# Altium PCB Digital_Clock_PCB_2.0.PcbDoc
Units mm, origin at the board's own origin, x right, y up, seen from the top; angles counter-clockwise.
Board outline 80.51 x 40.51 mm, 2 copper layers (Top Layer, Bottom Layer); 42 components, 38 nets, 161 pads, 25 vias.
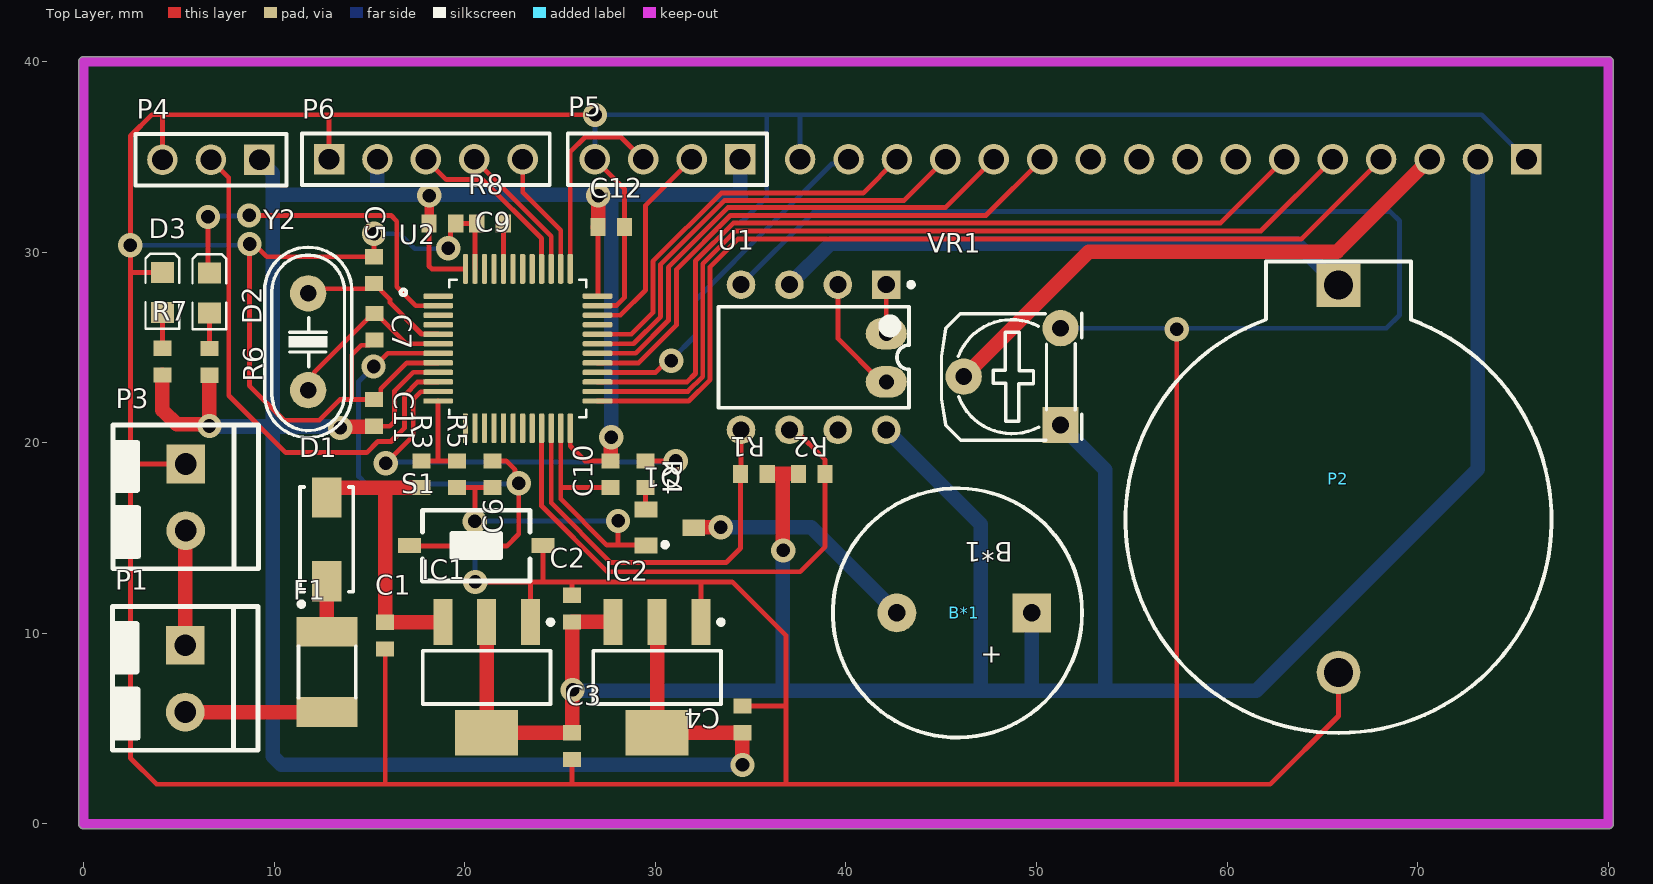
[diagram p0: Top Layer view]
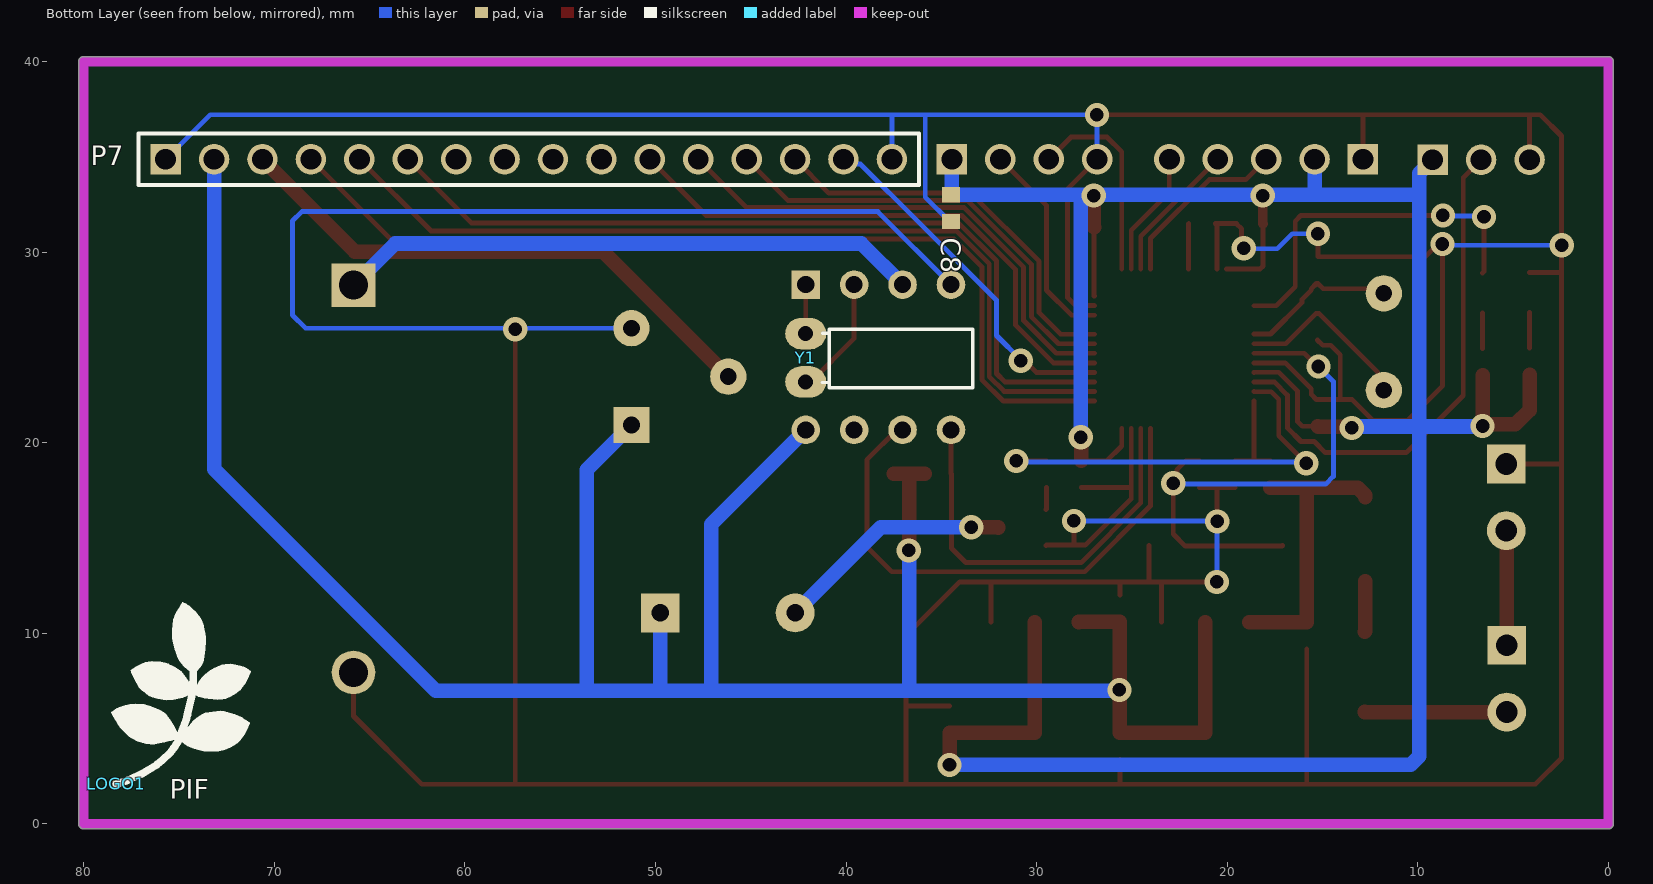
[diagram p1: Bottom Layer view, seen from below]
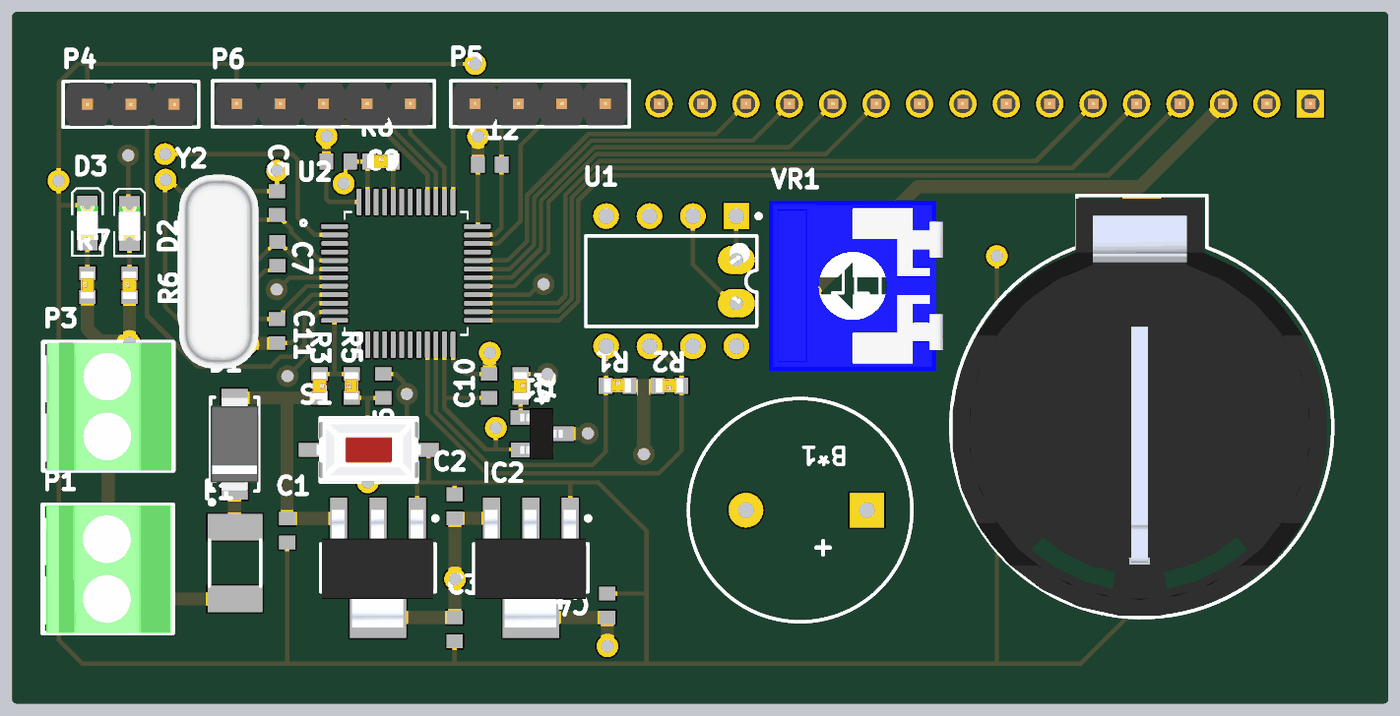
[diagram p2: 3D render of the assembled board from above, using the file's embedded part models]

## Layer stack, top to bottom
Top Solder: solder mask 0.0102, Solder Resist, Dk 3.5
Top Layer: signal copper 0.0356
Dielectric 1: dielectric 0.32, FR-4, Dk 4.8
Bottom Layer: signal copper 0.0356
Bottom Solder: solder mask 0.0102, Solder Resist, Dk 3.5

## Board outline
0,-0.254 cw(c0,0) -0.254,0 -0.254,40 cw(c0,40) 0,40.254 80,40.254 cw(c80,40) 80.254,40 80.254,0 cw(c80,0) 80,-0.254

## Design rules (kind name [scope] priority, off if disabled: settings)
Clearance [All] p1: gap=0.203 ignorepadtopadclearanceinfootprint=FALSE
PolygonConnect [All] p1: connectstyle=Relief reliefconductorwidth=0.254 reliefentries=4 polygonreliefangle="90 Angle" airgapwidth=0.254
RoutingVias [All] p1: holewidth=0.711 width=1.27 viastyle="Through Hole" minholewidth=0.6 minwidth=0.3 maxholewidth=0.711 maxwidth=1.27
SolderMaskExpansion [All] p1: expansion=0.102 istentingtop=FALSE
Width [All] p1: maxlimit=0.762 minlimit=0.254 preferedwidth=0.508
30 further rules are at their usual default settings.

## Components (designator, comment, footprint, x,y, rotation, side; value= is the part's Value field where it differs from the comment)
B*1 "Buzzer" BUZZER 47.752,11.074 r180 top
C1 "Cap Non-Pol SMD" CAP-SM-0603 15.824,9.881 r90 top value=10uF
C2 "Cap Non-Pol SMD" CAP-SM-0603 25.629,11.303 r270 top value=10uF
C3 "Cap Non-Pol SMD" CAP-SM-0603 25.629,4.089 r90 top value=10uF
C4 "Cap Non-Pol SMD" CAP-SM-0603 34.569,5.486 r270 top value=10uF
C5 "Cap Non-Pol SMD" CAP-SM-0603 15.24,29.058 r270 top value=20pF
C6 "Cap Non-Pol SMD" CAP-SM-0603 21.463,18.35 r90 top value=0.1uF
C7 "Cap Non-Pol SMD" CAP-SM-0603 15.265,26.086 r270 top value=20pF
C8 "Cap Non-Pol SMD" CAP-SM-0603 34.493,32.309 r90 bottom value=0.1uF
C9 "Cap Non-Pol SMD" CAP-SM-0603 18.821,31.496 r180 top value=100nF
C10 "Cap Non-Pol SMD" CAP-SM-0603 27.648,18.35 r90 top value=100nF
C11 "Cap Non-Pol SMD" CAP-SM-0603 15.24,21.565 r270 top value=100nF
C12 "Cap Non-Pol SMD" CAP-SM-0603 27.686,31.318 r180 top value=100nF
D1 "D Schottky" SS34 12.751,14.935 r90 top
D2 "LED SMD" LED_0805_Blue 6.604,27.864 r90 top
D3 "LED SMD" LED_0805_Blue 4.14,27.889 r90 top
F1 "Fuse" "FUSE SMD" 12.776,7.976 r270 top
IC1 "LM1117" SOT223-4N 21.147,7.692 r270 top value=LM317
IC2 "LM1117" SOT223-4N 30.088,7.692 r270 top value=LM317
LOGO1 "LOGO PIF" "PIF LOGO BIG SSTOP" 78.559,1.746 r180 bottom
P1 "Domino 2" "DOMINO SMALL 2" 6.604,9.373 r270 top
P2 "VBAT" "VBAT CR2030" 65.837,18.11 r90 top
P3 "Domino 2" "DOMINO SMALL 2" 6.629,18.892 r270 top
P4 "61300311121" 61300311121 6.68,34.849 r180 top
P5 "61300411121" 61300411121 30.632,34.874 r180 top
P6 "61300511121" 61300511121 17.958,34.874 r0 top
P7 "61301611121" 61301611121 56.642,34.874 r180 bottom
Q1 "C1815" SOT23B 30.759,15.545 r270 top
R1 "RESISTOR SMD" RES-SM-0603 34.479,18.364 r0 top value=10K
R2 "RESISTOR SMD" RES-SM-0603 38.887,18.364 r180 top value=10K
R3 "RESISTOR SMD" RES-SM-0603 17.729,19.036 r270 top value=10K
R4 "RESISTOR SMD" RES-SM-0603 29.489,19.036 r270 top value=22K
R5 "RESISTOR SMD" RES-SM-0603 19.596,17.664 r90 top value=10K
R6 "RESISTOR SMD" RES-SM-0603 6.604,23.557 r90 top value=1K
R7 "RESISTOR SMD" RES-SM-0603 4.14,23.571 r90 top value=1K
R8 "RESISTOR SMD" RES-SM-0603 20.636,31.496 r0 top value=100K
S1 "Tact SW - 2Pin" SW-SMD 20.599,14.605 r0 top
U1 "DS1307+" MAXM-P8-1 38.303,24.486 r270 top
U2 "STM32F103C8T6" QFP50P900X900X160-48N 22.784,24.943 r0 top
VR1 "10K" "Varistor 1" 51.257,20.93 r90 top value="VR 10K"
Y1 "32.768kHz" "XTAL 32768 3x8" 42.113,23.19 r180 bottom
Y2 "XTAL" XT2 11.786,25.298 r90 top

## Footprints (in the part's own frame and the unit in brackets; to place one, negate y for a bottom-side part, rotate by r counter-clockwise, add the part's x,y. Pads: shape width x height; smd on the part's side, far side on the other; paste and mask are expansions set on the pad)
61300311121 [mm] "Pin Header, pitch 2.54 mm, THT, Vertical, single row, 3p"
  rect 1.6x1.6 hole 1.1: 1(-2.54,0)
  round 1.6 hole 1.1: 2(0,0) 3(2.54,0)
  silkscreen extent -3.96,-1.35 3.96,1.35, body extent -3.81,-1.27 3.81,1.27, height 8.57
61300411121 [mm] "Pin Header, pitch 2.54 mm, THT, Vertical, single row, 4p"
  rect 1.6x1.6 hole 1.1: 1(-3.81,0)
  round 1.6 hole 1.1: 2(-1.27,0) 3(1.27,0) 4(3.81,0)
  silkscreen extent -5.23,-1.35 5.23,1.35, body extent -5.08,-1.27 5.08,1.27, height 8.57
61300511121 [mm] "Pin Header, pitch 2.54 mm, THT, Vertical, single row, 5p"
  rect 1.6x1.6 hole 1.1: 1(-5.08,0)
  round 1.6 hole 1.1: 2(-2.54,0) 3(0,0) 4(2.54,0) 5(5.08,0)
  silkscreen extent -6.5,-1.35 6.5,1.35, body extent -6.35,-1.27 6.35,1.27, height 8.57
61301611121 [mm] "Pin Header, pitch 2.54 mm, THT, Vertical, single row, 16p"
  rect 1.6x1.6 hole 1.1: 1(-19.05,0)
  round 1.6 hole 1.1: 2(-16.51,0) 3(-13.97,0) 4(-11.43,0) 5(-8.89,0) 6(-6.35,0) 7(-3.81,0) 8(-1.27,0) 9(1.27,0) 10(3.81,0) 11(6.35,0) 12(8.89,0) 13(11.43,0) 14(13.97,0) 15(16.51,0) 16(19.05,0)
  silkscreen extent -20.47,-1.35 20.47,1.35, body extent -20.32,-1.27 20.32,1.27, height 8.57
BUZZER [mil]
  rect 80x80 hole 36: 1(-78.73,0)
  round 80 hole 36: 2(200,0)
  silkscreen extent -182,-257 332,257
CAP-SM-0603 [mm] "SMD Ceramic Capacitor Size 0603"
  rect 0.8x0.95 smd: 1(-0.7,0) 2(0.7,0)
  body extent -0.85,-0.45 0.85,0.45, height 0.6
"DOMINO SMALL 2" [mil] "3.5 mm"
  rect 80x80 hole 45: 1(0,-50)
  round 80 hole 45: 2(137.8,-50)
  silkscreen extent -80,-203 217,100, body extent -79,-192 217,95, height 335
"FUSE SMD" [mm] "SMD FUSE"
  rect 1.55x3.21 smd: 1(-2.1,0) 2(2.1,0)
  silkscreen extent -1.35,-1.5 1.35,1.51, body extent -2.37,-1.71 2.36,1.71, height 0.75
LED_0805_Blue [mm] "Chip LED, 2-Leads, Body 2.0x1.3mm, IPC Medium Density"
  rect 1.1x1.2 smd: 1(-1.05,0) 2(1.05,0)
  silkscreen extent -1.91,-0.89 2.03,0.89, body extent -1,-0.63 1,0.62, height 0.68
MAXM-P8-1 [mm] "DIP, 8-Leads, Body 9.375x6.985mm, Pitch 2.54mm"
  rect 1.5x1.5 hole 0.9: 1(-3.81,3.81)
  round 1.5 hole 0.9: 2(-3.81,1.27) 3(-3.81,-1.27) 4(-3.81,-3.81) 5(3.81,-3.81) 6(3.81,-1.27) 7(3.81,1.27) 8(3.81,3.81)
  silkscreen extent -3.93,-5 2.65,5.24, body extent -3.95,-4.95 3.95,4.95, height 4.58
"PIF LOGO BIG SSTOP" [mil]
  rect 15x15 smd: 1(11,14)
  silkscreen extent 0,14 289,389
QFP50P900X900X160-48N [mm]
  rrect50% 1.56x0.28 smd: 1(-4.18,2.75) 2(-4.18,2.25) 3(-4.18,1.75) 4(-4.18,1.25) 5(-4.18,0.75) 6(-4.18,0.25) 7(-4.18,-0.25) 8(-4.18,-0.75) 9(-4.18,-1.25) 10(-4.18,-1.75) 11(-4.18,-2.25) 12(-4.18,-2.75) 25(4.18,-2.75) 26(4.18,-2.25) 27(4.18,-1.75) 28(4.18,-1.25) 29(4.18,-0.75) 30(4.18,-0.25) 31(4.18,0.25) 32(4.18,0.75) 33(4.18,1.25) 34(4.18,1.75) 35(4.18,2.25) 36(4.18,2.75)
  rrect50% 0.28x1.56 smd: 13(-2.75,-4.18) 14(-2.25,-4.18) 15(-1.75,-4.18) 16(-1.25,-4.18) 17(-0.75,-4.18) 18(-0.25,-4.18) 19(0.25,-4.18) 20(0.75,-4.18) 21(1.25,-4.18) 22(1.75,-4.18) 23(2.25,-4.18) 24(2.75,-4.18) 37(2.75,4.18) 38(2.25,4.18) 39(1.75,4.18) 40(1.25,4.18) 41(0.75,4.18) 42(0.25,4.18) 43(-0.25,4.18) 44(-0.75,4.18) 45(-1.25,4.18) 46(-1.75,4.18) 47(-2.25,4.18) 48(-2.75,4.18)
  silkscreen extent -6.15,-3.6 3.6,3.6
RES-SM-0603 [mm]
  rect 0.8x0.95 smd: 1(-0.014,0) 2(1.386,0)
  body extent -0.11,-0.4 1.49,0.4, height 0.3
SOT23B [mm] "SOT 23B"
  rect 0.85x1.2 smd: 1(0.94,-1.245) 2(0,1.25) 3(-0.95,-1.25)
  silkscreen extent 0.77,-0.38 1.02,-0.13, body extent -1.5,-1.3 1.5,1.2, height 1.06
SOT223-4N [mm] "SOT223, 4-Leads, Body 6.5x3.5mm, Pitch 2.3mm, Lead Span 7mm, IPC Medium Density"
  rect 2.4x1 smd: 1(-2.9,2.3) 2(-2.9,0) 3(-2.9,-2.3)
  rect 2.4x3.3 smd: 4(2.9,0)
  silkscreen extent -3.02,-3.35 1.4,3.48, body extent -3.39,-3.27 3.5,3.23, height 1.72
SS34 [mm] "DO-214-AC/SMA Molded Diode, Body 5.3x2.6mm, IPC Medium Density"
  rect 2.1x1.55 smd: 1(-2.2,0) 2(2.2,0)
  silkscreen extent -3.52,-1.4 2.75,1.45, body extent -2.75,-1.4 2.75,1.4, height 2.3
SW-SMD [mm] "Switch SMD type"
  rect 1.2x0.8 smd: 1(-3.5,0) 2(3.5,0)
  silkscreen extent -2.82,-1.85 2.82,1.85, body extent -3.05,-1.85 3.05,1.85, height 2.5
"Varistor 1" [mil] "Resistor Variable"
  rect 75x75 hole 35: 1(0,0)
  round 75 hole 35: 2(100,200) 3(200,0)
  silkscreen extent -31,-44 231,246, body extent -68,-117 326,285, height 165
"VBAT CR2030" [mil]
  rect 90x90 hole 60: 1(400,0)
  round 90 hole 60: 2(-400,0)
  silkscreen extent -525,-440 449,440, body extent -523,-428 442,438, height 335
XT2 [mil] "Footpin for Crystal 2 pin"
  round 75 hole 34: 1(-100,0) 2(100,0)
  silkscreen extent -198,-90 195,90, body extent -233,-93 213,90, height 138
"XTAL 32768 3x8" [mil] "Crystal for 32,768kHz, 2pin"
  oval 85x65 hole 31: 1(0,0) 2(0,100)
  silkscreen extent 34,-12 345,109, body extent -11,-1 339,111, height 79

## Part data
C1 C2 C3 C4 C5 C6 C7 C8 C9 C10 C11 C12: "Capacitor"
D1: "Schottky Diode", Code_JEDEC=DO-214-AA, LatestRevisionDate=17-Jul-2002, LatestRevisionNote="Re-released for DXP Platform.", PackageDescription="DO-214-AA/SMB; 2 C-Bend Leads; Body 5.3 x 3.6 mm, inc. leads (LxW)", PackageReference=SMB, Published=8-Jun-2000, Publisher="Altium Limited"
D2 D3: "LED"
IC1 IC2: "Available in 1.8V, 2.5V, 2.85V, 3.3V, 5V, and  Adjustable Versions"
P1 P3: "Domino, 2-Pin", LatestRevisionDate=17-Jul-2002, LatestRevisionNote="Re-released for DXP Platform.", Publisher="Altium Limited"
P2: library part "VBAT CR2032", "CR2032", Manufacturer="DANTONA INDUSTRIES", Manufacturer Part Number="CR2032 SANYO", ComponentLink1Description=http://www.farnell.com/datasheets/1797668.pdf, ComponentLink1URL=http://www.farnell.com/datasheets/1797668.pdf, ComponentLink2Description=/datasheets/DANTONA/CRSANYO.pdf, ComponentLink2URL=/datasheets/DANTONA/CRSANYO.pdf, Pricing 1="1=0.768, 5=0.655, 10=0.615, 25=0.565, 50=0.51, 100=0.46, 250=0.41 (USD)", RoHS=NA, Stock 1=1694, Supplier 1=Newark
P4: "WR-PHD Pin Header, THT, pitch 2.54mm, Single Row, Vertical, 3p", Contact Resistance=20mOhm, Manufacturer="Wurth Elektronik", Operating Temperature="-40 to +105degC", Rated Current=3A, Withstanding Voltage=500VAC, Working Voltage=250VAC, ComponentLink1Description=Manufacturer, ComponentLink1URL=http://www.we-online.de, ComponentLink2Description=Datasheet, ComponentLink2URL=https://www.we-online.com/catalog/datasheet/61300311121.pdf, Gender="Pin Header", Manufacturer Part Number=61300311121, Mounting Technology=THT, Orientation=Vertical, Packaging=Bag, Pin Number=3, Pitch=2.54mm, Published Date="May 2020", Row Number=Single
P5: "WR-PHD Pin Header, THT, pitch 2.54mm, Single Row, Vertical, 4p", Contact Resistance=20mOhm, Manufacturer="Wurth Elektronik", Operating Temperature="-40 to +105degC", Rated Current=3A, Withstanding Voltage=500VAC, Working Voltage=250VAC, ComponentLink1Description=Manufacturer, ComponentLink1URL=http://www.we-online.de, ComponentLink2Description=Datasheet, ComponentLink2URL=https://www.we-online.com/catalog/datasheet/61300411121.pdf, Gender="Pin Header", Manufacturer Part Number=61300411121, Mounting Technology=THT, Orientation=Vertical, Packaging=Bag, Pin Number=4, Pitch=2.54mm, Published Date="May 2020", Row Number=Single
P6: "WR-PHD Pin Header, THT, pitch 2.54mm, Single Row, Vertical, 5p", Contact Resistance=20mOhm, Manufacturer="Wurth Elektronik", Operating Temperature="-40 to +105degC", Rated Current=3A, Withstanding Voltage=500VAC, Working Voltage=250VAC, ComponentLink1Description=Manufacturer, ComponentLink1URL=http://www.we-online.de, ComponentLink2Description=Datasheet, ComponentLink2URL=https://www.we-online.com/catalog/datasheet/61300511121.pdf, Gender="Pin Header", Manufacturer Part Number=61300511121, Mounting Technology=THT, Orientation=Vertical, Packaging=Bag, Pin Number=5, Pitch=2.54mm, Published Date="May 2020", Row Number=Single
P7: "WR-PHD Pin Header, THT, pitch 2.54mm, Single Row, Vertical, 16p", Contact Resistance=20mOhm, Manufacturer="Wurth Elektronik", Operating Temperature="-40 to +105degC", Rated Current=3A, Withstanding Voltage=500VAC, Working Voltage=250VAC, ComponentLink1Description=Manufacturer, ComponentLink1URL=http://www.we-online.de, ComponentLink2Description=Datasheet, ComponentLink2URL=https://www.we-online.com/catalog/datasheet/61301611121.pdf, Gender="Pin Header", Manufacturer Part Number=61301611121, Mounting Technology=THT, Orientation=Vertical, Packaging=Bag, Pin Number=16, Pitch=2.54mm, Published Date="May 2020", Row Number=Single
Q1: "NPN Bipolar Transistor"
R1 R2 R3 R4 R5 R6 R7 R8: "Resistor"
S1: "Switch button 2 pin"
U1: library part CMP-016-00004-3, "I2C Real-Time Clock, 5 V, 0 to 70 degC, 8-Pin DIP, RoHS, Tube", Case/Package=DIP, Manufacturer=Maxim, Max Operating Temperature=70°C, Max Supply Voltage=5.5V, Min Operating Temperature=0°C, Min Supply Voltage=4.5V, Nominal Supply Voltage=5V, Package Description="8-Pin Plastic Dual-In-Line, Narrow (0.3in) (P8-1), Body 9.375 x 6.985 mm, Pitch 2.54 mm", Package Quantity=50, Package Reference=P8-1, Package Version="Rev. E, 04/2011", Datasheet URL=https://datasheet.ciiva.com/20167/82-0567-20167410.pdf, Datasheet Version="Rev. 100208, 10/2008", Interface=Serial, Manufacturer URL=http://www.maximintegrated.com/, Mounting Technology=TH, Package URL=http://pdfserv.maximintegrated.com/package_dwgs/21-0043.PDF, Packaging=Rail/Tube, Pins=8, RoHS Compliant=True
U2: "Mainstream Performance line, ARM Cortex-M3 MCU with 64 Kbytes Flash, 72 MHz CPU, motor control, USB and CAN", Package=None, Availability=Unavailable, MP=STM32F103C8T6, Price=None
VR1: library part "Var Resistor", "Var Resistor"
Y1: library part XTAL, "Crystal For all Crystal 2pin"
Y2: "Crystal Oscillator", LatestRevisionDate=17-Jul-2002, LatestRevisionNote="Re-released for DXP Platform.", PackageDescription="Crystal, Thru-Hole; 2 Leads; Body 3.1 x 8.2 mm (Dia.xH)", PackageReference=R38, Published=8-Jun-2000, Publisher="Altium Limited"

## Via types
v1: diameter 1.27, hole 0.711, Top Layer to Bottom Layer, 17 vias
v2: diameter 1.27, hole 0.711, Top Layer to Bottom Layer, tented both sides, 8 vias

## Nets (pads, with @x,y where several pads share a name; then routed paths per layer and width w, separated by ;. In a path a pad name is that pad's centre, name@x,y a point inside that pad or via, vN(x,y) a via of type N, cw(c..) or ccw(c..) an arc to the next point about the centre after c; other vN are vias at no path point)
3V3: C4.2 C8.2 C9.2 C10.2 C11.2 C12.2 IC2.2 IC2.4 P4.1 P5.1 P6.2 R6.1 R7.1 U2.9 U2.24 U2.36 U2.48 | length 146.5
  Top Layer w0.254: C11.2 16.064,20.865 16.307,21.107 16.307,22.708 17.297,23.698 18.598,23.698 U2.9 ; C9.2 18.121,29.272 18.27,29.123 U2.48 ; U2.24 25.534,19.831 26.314,19.05 C10.2 ; U2.36 26.973,27.693 26.986,27.706 C12.2
  Top Layer w0.508: C9.2 18.129,31.503 18.129,32.962 v1(18.136,32.969)
  Top Layer w0.762: R7.1 4.14,21.717 4.881,20.976 6.507,20.976 v1(6.604,20.879) R6.1 ; v1(13.462,20.777) 13.53,20.846 15.221,20.846 C11.2 ; C12.2 26.993,31.325 26.993,32.962 v1(27,32.969) ; C10.2 27.667,19.069 27.667,20.276 v1(27.686,20.295) ; IC2.2 IC2.4 30.093,4.786 C4.2 v1(34.569,3.099)
  Bottom Layer w0.762: v1(6.604,20.879) 6.629,20.853 9.934,20.853 ; P4.1 9.934,34.135 9.934,33.009 ; v1(13.462,20.777) 13.386,20.853 9.934,20.853 ; P6.2 15.418,33.034 15.392,33.009 ; v1(27.686,20.295) 27.686,33.009 ; P5.1 34.442,33.028 C8.2@34.461,33.009 ; C8.2 C8.2@34.461,33.009 ; v1(34.569,3.099) 10.38,3.099 9.934,3.545 9.934,20.853 ; 9.934,20.853 9.934,33.009 ; 9.934,33.009 15.392,33.009 ; 15.392,33.009 18.136,33.009 27.686,33.009 ; 27.686,33.009 C8.2@34.461,33.009
5V: B*1.1 C2.2 C3.2 IC1.2 IC1.4 IC2.3 P7.2 R1.2 R2.2 U1.8 VR1.1 | length 134.7
  Top Layer w0.762: IC1.2 IC1.4 21.149,4.789 C3.2 25.635,4.789 25.641,4.796 25.641,7.023 v1(25.654,7.036) 25.641,7.048 25.641,10.59 C2.2 27.776,10.603 IC2.3 ; R1.2 36.683,18.364 ; v2(36.703,14.351) 36.683,14.371 36.683,18.364 ; R2.2 36.683,18.364
  Bottom Layer w0.762: v1(25.654,7.036) 25.705,6.985 36.69,6.985 ; v2(36.703,14.351) 36.69,14.338 36.69,6.985 ; U1.8 47.066,15.723 47.066,6.985 ; B*1.1 49.752,6.985 ; VR1.1 53.594,18.593 53.594,6.985 ; P7.2 73.152,18.618 61.519,6.985 53.594,6.985 ; 36.69,6.985 47.066,6.985 ; 47.066,6.985 49.752,6.985 ; 49.752,6.985 53.594,6.985
ADC_PIN: R3.1 R5.2 U2.12 | length 5
  Top Layer w0.254: R3.1 18.663,19.05 ; U2.12 18.604,19.109 18.663,19.05 ; R5.2 18.663,19.05
BL: P7.15 U2.28 | length 18.9
  Top Layer w0.254: U2.28 30.014,23.693 30.629,24.308 v2(30.836,24.308)
  Bottom Layer w0.254: v2(30.836,24.308) 30.836,24.359 32.106,25.629 32.106,27.483 36.22,31.598 39.239,34.617 39.874,34.617 P7.15
BOOT0: R8.2 U2.44 | length 2.4
  Top Layer w0.254: R8.2 22.034,31.484 U2.44
BUZZER: R4.1 U2.11 | length 22.3
  Top Layer w0.254: v2(15.85,18.923) 17.297,20.371 17.297,22.276 17.701,22.68 18.591,22.68 U2.11 ; R4.1 v2(31.064,19.05)
  Bottom Layer w0.254: v2(15.85,18.923) 15.913,18.986 31.001,18.986 v2(31.064,19.05)
D4: P7.11 U2.29 | length 29.5
  Top Layer w0.254: U2.29 29.12,24.193 31.115,26.187 31.115,29.103 33.94,31.928 47.346,31.928 P7.11
D5: P7.12 U2.30 | length 26.6
  Top Layer w0.254: U2.30 28.96,24.693 30.683,26.416 30.683,29.21 33.807,32.334 45.212,32.334 P7.12
D6: P7.13 U2.31 | length 23.9
  Top Layer w0.254: U2.31 28.85,25.193 30.277,26.619 30.277,29.362 33.63,32.715 43.053,32.715 P7.13
D7: P7.14 U2.32 | length 21.1
  Top Layer w0.254: U2.32 28.741,25.693 29.87,26.822 29.87,29.515 33.452,33.096 40.894,33.096 P7.14
DHT_PIN: P4.2 U2.10 | length 27.5
  Top Layer w0.254: P4.2 7.62,33.909 7.62,22.479 10.617,19.482 14.859,19.482 15.443,20.066 16.129,20.066 16.84,20.777 16.84,22.504 17.529,23.193 U2.10
EN: P7.6 U2.27 | length 44.3
  Top Layer w0.254: U2.27 31.666,23.193 32.106,23.633 32.106,29.54 34.087,31.521 59.639,31.521 P7.6
GND: C1.1 C2.1 C3.1 C4.1 C5.1 C6.1 C7.2 C8.1 C9.1 C10.1 C11.1 C12.1 D3.2 IC1.1 IC2.1 P2.2 P3.1 P4.3 P5.4 P6.1 P7.1 P7.16 Q1.1 R5.1 R8.1 S1.2 U1.4 U2.8 U2.23 U2.35 U2.47 VR1.3 | length 404.6
  Top Layer w0.254: D3.2 2.464,28.939 ; P4.3 4.14,37.211 ; P3.1 2.464,18.892 ; P6.1 12.878,37.211 ; v1(15.24,30.963) C5.1 9.611,29.758 9.158,30.211 8.91,30.211 8.699,30 8.699,23 10.516,21.184 12.37,21.184 13.451,22.265 14.072,22.265 ; C7.2 14.992,25.113 14.572,25.113 14.072,24.613 14.072,22.265 ; C1.1 15.824,2.083 ; U2.8 16.954,24.193 15.596,22.835 15.596,22.62 15.588,22.613 15.588,22.538 15.315,22.265 C11.1 14.072,22.265 ; v1(19.135,30.205) 19.248,30.318 19.248,31.223 C9.1 R8.1 20.534,31.408 U2.47 ; R5.1 20.53,17.65 ; v1(20.523,15.875) 20.53,15.881 20.53,17.65 ; v1(20.549,12.7) 23.447,12.7 ; C6.1 20.53,17.65 ; IC1.1 23.447,12.7 ; S1.2 24.099,12.7 ; U2.23 25.034,17.653 ; C3.1 25.629,2.121 25.59,2.083 ; C2.1 25.629,12.675 25.654,12.7 ; P5.4 28.372,33.325 28.372,27.61 27.968,27.206 26.977,27.206 U2.35 ; v1(26.835,37.198) 26.822,37.211 12.878,37.211 ; C10.1@27.645,17.653 C10.1 25.037,17.65 25.034,17.653 ; v1(28.042,15.9) 28.042,14.656 28.016,14.63 ; Q1.1 29.489,14.63 28.016,14.63 ; IC2.1 32.388,12.697 32.385,12.7 ; C4.1 36.819,6.186 36.855,6.223 ; v1(57.353,25.959) 57.353,2.083 ; P2.2 65.837,5.664 62.255,2.083 57.353,2.083 ; 2.464,18.892 2.464,28.939 ; 2.464,18.892 2.464,3.454 3.835,2.083 15.824,2.083 ; 2.464,28.939 2.464,30.353 v1(2.451,30.366) 2.464,30.378 2.464,36.093 3.581,37.211 4.14,37.211 ; 4.14,37.211 12.878,37.211 ; 15.824,2.083 25.59,2.083 ; 23.447,12.7 24.099,12.7 ; 24.099,12.7 25.654,12.7 ; 25.034,17.653 25.034,17.054 27.457,14.63 28.016,14.63 ; 25.59,2.083 36.855,2.083 ; 25.654,12.7 32.385,12.7 ; 32.385,12.7 34.036,12.7 36.855,9.881 36.855,6.223 ; 36.855,2.083 57.353,2.083 ; 36.855,2.083 36.855,6.223
  Bottom Layer w0.254: v1(2.451,30.366) 8.649,30.366 v1(8.712,30.429) ; v1(15.24,30.963) 16.586,30.963 17.374,30.175 19.105,30.175 v1(19.135,30.205) ; v1(20.549,12.7) 20.536,12.713 20.536,15.862 v1(20.523,15.875) 20.536,15.888 28.029,15.888 v1(28.042,15.9) ; P5.4 26.835,34.887 v1(26.835,37.198) 26.848,37.211 35.839,37.211 ; U1.4 38.329,32.131 68.555,32.131 69.037,31.648 69.037,26.695 68.351,26.01 VR1.3 ; C8.1 34.568,31.609 35.839,32.88 35.839,37.211 ; P7.16 37.592,37.211 ; P7.1 73.355,37.211 37.592,37.211 ; 35.839,37.211 37.592,37.211
I2C_SCL: R2.1 U1.6 U2.21 | length 28
  Top Layer w0.254: U2.21 24.034,16.682 27.483,13.233 37.592,13.233 38.902,14.543 38.902,19.098 37.324,20.676 U1.6
I2C_SDA: R1.1 U1.5 U2.22 | length 21.7
  Top Layer w0.254: U2.22 24.534,16.843 27.661,13.716 33.706,13.716 34.465,14.475 R1.1 34.493,18.393 U1.5
NetB*1_2: B*1.2 Q1.2 | length 12.5
  Top Layer w0.762: Q1.2 32.022,15.557 33.414,15.557 v2(33.426,15.57)
  Bottom Layer w0.762: v2(33.426,15.57) 38.176,15.57 B*1.2
NetD1_1: D1.1 F1.1 | length 2.7
  Top Layer w0.762: D1.1 12.751,10.101 F1.1
NetD2_1: D2.1 R6.2 | length 1.9
  Top Layer w0.254: R6.2 D2.1
NetD3_1: D3.1 R7.2 | length 1.9
  Top Layer w0.254: R7.2 D3.1
NetF1_2: F1.2 P1.2 | length 7.4
  Top Layer w0.762: P1.2 5.336,5.874 12.775,5.874 F1.2
NetP1_1: P1.1 P3.2 | length 6
  Top Layer w0.762: P1.1 5.347,9.385 5.347,15.38 P3.2
NetP2_1: P2.1 U1.3 | length 30.6
  Bottom Layer w0.762: U1.3 39.192,30.455 63.652,30.455 P2.1
NetP7_3: P7.3 VR1.2 | length 29.2
  Top Layer w0.762: VR1.2 52.73,30.023 65.761,30.023 P7.3
NetQ1_3: Q1.3 R4.2 | length 1.2
  Top Layer w0.254: R4.2 29.489,16.515 Q1.3
NetU1_1: U1.1 Y1.2 | length 2.6
  Top Layer w0.254: Y1.2 U1.1
NetU1_2: U1.2 Y1.1 | length 6.3
  Top Layer w0.254: U1.2 39.573,25.476 41.859,23.19 Y1.1
NRST: C6.2 S1.1 U2.7 | length 29.2
  Top Layer w0.254: v2(15.215,24.003) 15.272,24.003 15.962,24.693 U2.7 ; S1.1 17.125,14.58 22.2,14.58 22.835,15.215 v2(22.835,17.882) 22.64,18.076 22.64,18.584 22.174,19.05 C6.2
  Bottom Layer w0.254: v2(15.215,24.003) 14.427,23.216 14.427,18.237 14.834,17.831 22.784,17.831 v2(22.835,17.882)
RCC_OSC_IN: C5.2 U2.5 Y2.2 | length 8.3
  Top Layer w0.254: Y2.2 12.032,28.085 14.967,28.085 C5.2 15.315,28.358 15.588,28.085 15.588,28.01 16.071,27.527 16.071,27.363 17.728,25.706 18.591,25.706 U2.5
RCC_OSC_OUT: C7.1 U2.6 Y2.1 | length 9.5
  Top Layer w0.254: Y2.1 12.102,23.074 12.102,23.697 15.19,26.786 C7.1 15.34,26.786 16.933,25.193 U2.6
RE_CLK: P6.5 U2.38 | length 6.6
  Top Layer w0.254: P6.5 23.038,33.134 25.034,31.138 U2.38
RE_DT: P6.4 U2.39 | length 7.4
  Top Layer w0.254: P6.4 24.534,30.838 U2.39
RE_SW: P6.3 U2.40 | length 9.4
  Top Layer w0.254: P6.3 19.025,33.807 20.945,33.807 24.034,30.718 U2.40
RS: P7.4 U2.25 | length 49.8
  Top Layer w0.254: U2.25 31.743,22.193 32.868,23.317 32.868,29.225 34.326,30.683 63.881,30.683 P7.4
RW: P7.5 U2.26 | length 47.1
  Top Layer w0.254: U2.26 31.704,22.693 32.487,23.475 32.487,29.382 34.219,31.115 61.773,31.115 P7.5
SWCLK: P5.3 U2.37 | length 10.8
  Top Layer w0.254: U2.37 25.534,35.262 26.314,36.043 28.194,36.043 P5.3
SWDIO: P5.2 U2.34 | length 10.9
  Top Layer w0.254: U2.34 28.166,26.693 29.489,28.016 29.489,32.461 P5.2
TESTING_LED: D2.2 U2.2 | length 19
  Top Layer w0.254: v2(6.528,31.852) 6.528,28.99 D2.2 ; v1(8.687,31.928) 16.129,31.928 16.434,31.623 16.434,28.194 17.435,27.193 U2.2
  Bottom Layer w0.254: v2(6.528,31.852) 6.566,31.89 8.649,31.89 v1(8.687,31.928)
Vin: C1.2 D1.2 IC1.3 R3.2 | length 15.4
  Top Layer w0.762: D1.2 12.751,17.256 13.145,17.65 15.824,17.65 ; R3.2 15.824,17.65 ; IC1.3 18.836,10.581 C1.2 15.824,17.65
pads on no net: LOGO1.1 P7.7 P7.8 P7.9 P7.10 U1.7 U2.1 U2.3 U2.4 U2.13 U2.14 U2.15 U2.16 U2.17 U2.18 U2.19 U2.20 U2.33 U2.41 U2.42 U2.43 U2.45 U2.46

## Keep-outs
Keep-Out Layer:
  lines w0.508: 0,0 80,0 80,40 0,40 0,0

## Text inside footprints (layer, text, board x,y; h text height)
B*1: Top Overlay "+" at 48.235,9.296 h1.02 r180
LOGO1: Bottom Overlay "PIF" at 75.468,1.314 h1.02